# Altium PCB 22270A_BoiteBruitage_LDD.PcbDoc
Units mm, origin at the board's own origin, x right, y up, seen from the top; angles counter-clockwise.
Board outline 130.66 x 56.64 mm, 2 copper layers (Top Layer, Bottom Layer), stack 1.586 mm thick; 94 components, 74 nets, 299 pads, 35 vias.
Unrouted connection lines stored in the file: 47.
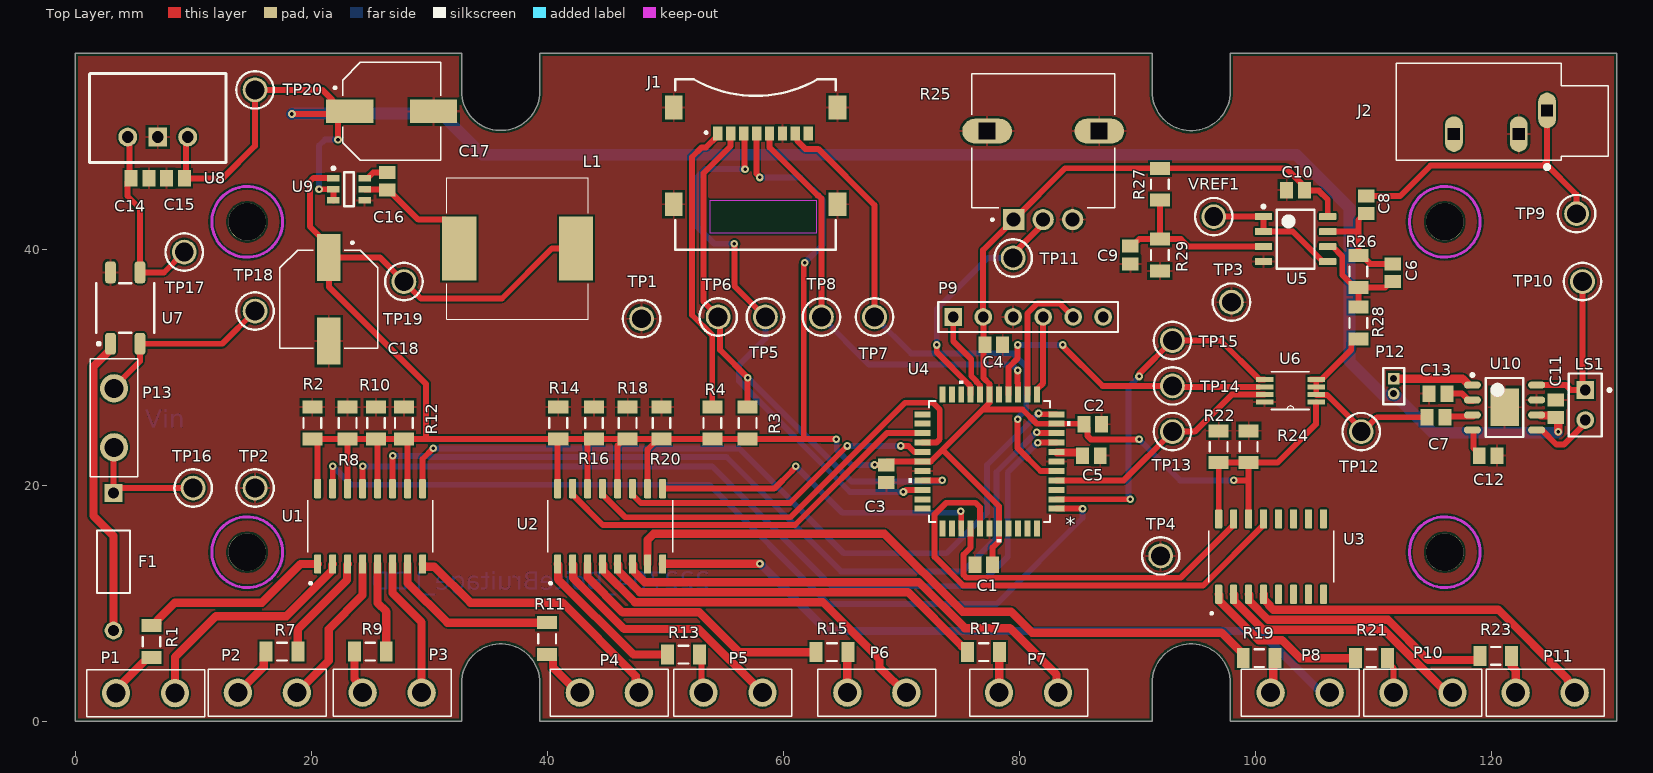
[diagram p0: Top Layer view]
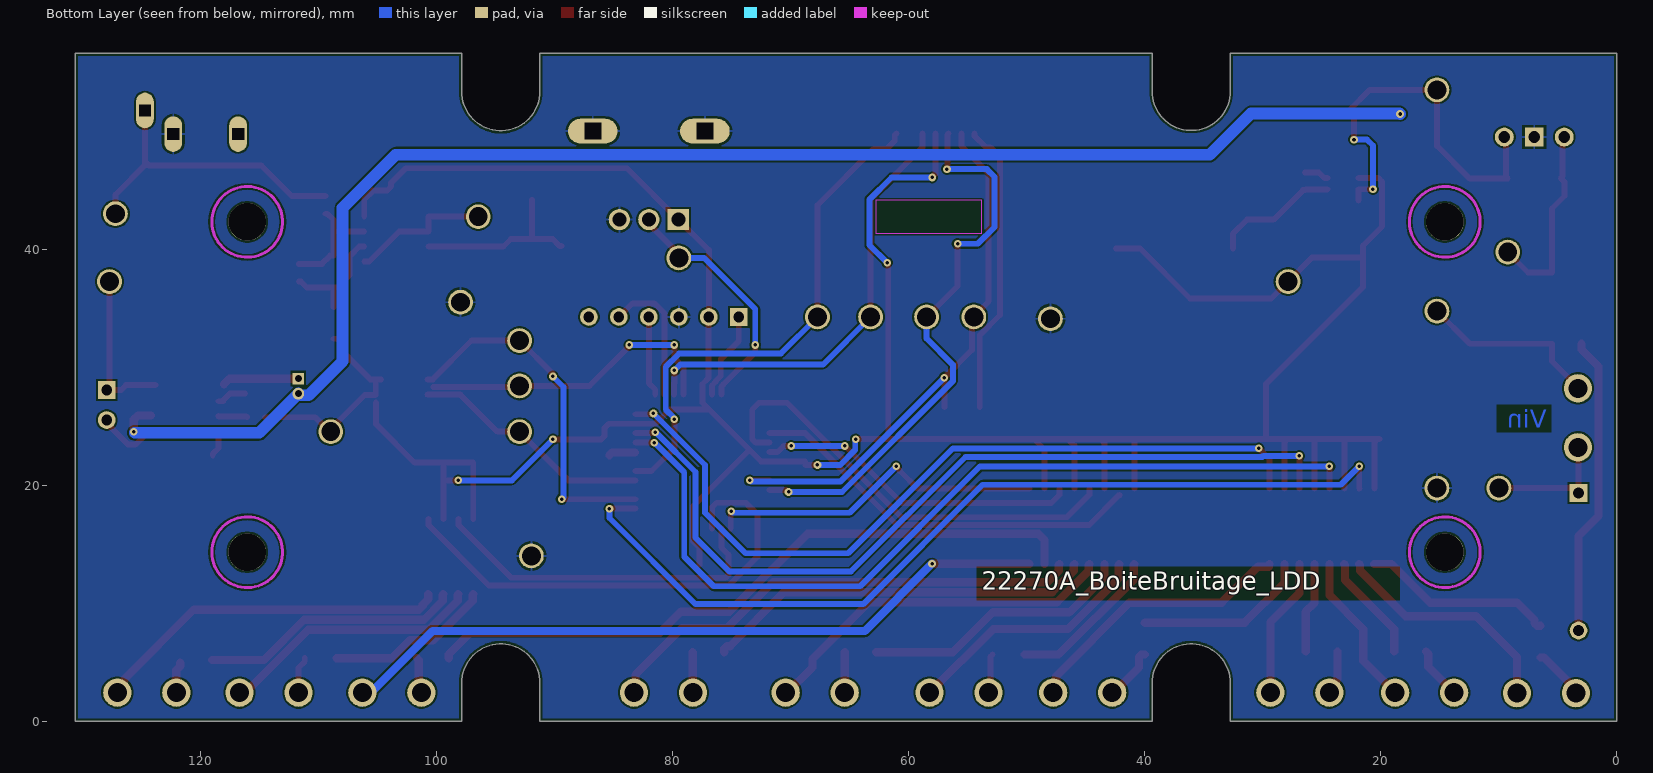
[diagram p1: Bottom Layer view, seen from below]

## Layer stack, top to bottom
Top Solder: solder mask 0.0102, Solder Resist, Dk 3.5
Top Layer: signal copper 0.018
Dielectric1: core 1.55, FR-4, Dk 4.8
Bottom Layer: signal copper 0.018
Bottom Solder: solder mask 0.0102, Solder Resist, Dk 3.5

## Board outline
32.76,0 32.76,3.235 cw(c36.075,3.235) 39.39,3.235 39.39,0 91.27,0 91.27,3.235 cw(c94.585,3.235) 97.9,3.235 97.9,0 97.905,-0.025 130.665,-0.025 130.665,56.585 97.905,56.585 97.905,53.35 cw(c94.59,53.35) 91.275,53.35 91.275,56.585 91.27,56.61 39.39,56.61 39.39,53.375 cw(c36.075,53.375) 32.76,53.375 32.76,56.61 0,56.61 0,0

## Design rules (kind name [scope] priority, off if disabled: settings)
BoardOutlineClearance [All] p1: gap=0.25 ignorepadtopadclearanceinfootprint=FALSE except(0: Arc-SplitContinuation Track-SplitContinuation SMDPad-SplitContinuation THPad-SplitContinuation Via-SplitContinuation Fill-SplitContinuation Poly-SplitContinuation Region-SplitContinuation Text-SplitContinuation)
Clearance Clearance-xPP-xTP-xTT [All] p1: gap=0.151 ignorepadtopadclearanceinfootprint=FALSE
ComponentClearance [All] p1: gap=0.25 collisioncheckmode=3 verticalgap=0.25 showdistances=FALSE
DiffPairsRouting [All] p1: maxlimit=0.25 minlimit=0.25 mostfreqgap=0.25 toplayer_minwidth=0.381 toplayer_maxwidth=0.381 toplayer_prefwidth=0.381 bottomlayer_minwidth=0.381 bottomlayer_maxwidth=0.381 bottomlayer_prefwidth=0.381 maxuncoupledlength=12.5
Height [All] p1: minheight=0 maxheight=30 prefheight=12.5
HoleSize HoleSize-PTH [All] p1: absolutevalues=TRUE maxlimit=10 minlimit=0.25 maxpercent=80.000 minpercent=20.000
HoleToHoleClearance [All] p1: gap=0.35 allowstackedmicrovias=FALSE
MinimumAnnularRing "Minimum IAR  >0.45mm" [((ObjectKind = 'Pad') OR (ObjectKind = 'Via')) And (Layer = 'MultiLayer') And (HoleDiameter > AsMM(0.45))] p1: minimumring=0.175 // minimum inner annular ring for pads > 0.45mm finished hole size
MinimumAnnularRing "Minimum IAR <=0.45mm" [((ObjectKind = 'Pad') OR (ObjectKind = 'Via')) And (Layer = 'MultiLayer') And (HoleDiameter <= AsMM(0.45))] p2: minimumring=0.175 // minimum inner annular ring for pads <= 0.45mm finished hole size
MinimumSolderMaskSliver [All] p1: minsoldermaskwidth=0.08
PasteMaskExpansion [All] p1: expansion=-0.025
PlaneClearance PlaneClearance-IPI [All] p1: clearance=0.25
PlaneConnect [All] p1: planeconnectstyle=Relief reliefexpansion=0.175 reliefentries=4 reliefconductorwidth=0.2 reliefairgap=0.2
PolygonConnect PolygonConnect-xTW [All] p1: connectstyle=Relief reliefconductorwidth=0.2 reliefentries=4 polygonreliefangle="90 Angle" airgapwidth=0.2
RoutingCorners [All] p1: cornerstyle=45-Degree minsetback=2.5 maxsetback=2.5
RoutingVias RoutingViasES [All] p1: holewidth=0.3 width=0.65 viastyle="Through Hole" minholewidth=0.25 minwidth=0.61 maxholewidth=0.45 maxwidth=0.8 // finishet hole size <= 0.45mm
SilkToSilkClearance [All] p1: silktosilkclearance=0.2
SilkToSolderMaskClearance SilkscreenOverComponentPads [IsPad] p1: minsilkscreentomaskgap=0.2 clearancetoexposedcopper=TRUE
SolderMaskExpansion [All] p1: expansion=0 istentingtop=FALSE
UnRoutedNet [All] p1: checkbadconnections=TRUE
Width Width-xTW [All] p1: maxlimit=1.5 minlimit=0.15 preferedwidth=0.2
17 further rules are at their usual default settings.

## Classes and differential pairs
component class Schéma_Global: C1 C2 C3 C4 C5 C6 C7 C8 C9 C10 C11 C12 C13 J2 LS1 P1 P2 P3 P4 P5 P6 P7 P8 P9 P10 P11 P12 R1 R2 R3 R4 R7 R8 R9 R10 R11 R12 R13 R14 R15 R16 R17 R18 R19 R20 R21 R22 R23 R24 R25 R26 R27 R28 R29 TP1 TP2 TP3 TP4 TP5 TP6 TP7 TP8 TP9 TP10 TP11 TP12 TP13 TP14 TP15 U1 U2 U3 U4 U5 U6 U10 VREF1
component class Alimentations: C14 C15 C16 C17 C18 F1 L1 P13 TP16 TP17 TP18 TP19 TP20 U7 U8 U9

## Components (designator, comment, footprint, x,y, rotation, side; value= is the part's Value field where it differs from the comment)
C1 "Cap" C0805 77,13.25 r180 top value=100nF
C2 "Cap" C0805 86.233,25.153 r0 top value=100nF
C3 "Cap" C0805 68.75,20.955 r270 top value=100nF
C4 "Cap" C0805 77.863,31.877 r0 top value=100nF
C5 "Cap" C0805 86.13,22.5 r180 top value=100nF
C6 "Cap" C0805 111.684,38 r270 top value=470pF
C7 "Cap" C0805 115.33,25.75 r180 top value=0,47uF
C8 "Cap" C0805 109.434,43.75 r270 top value=1uF
C9 "Cap" C0805 89.434,39.5 r90 top value=330nF
C10 "Cap" C0805 103.434,45 r0 top value=100nF
C11 "Cap" C0805 125.497,26.476 r90 top value=10uF
C12 "Cap" C0805 119.75,22.5 r180 top value=0,47uF
C13 "Cap" C0805 115.5,27.75 r0 top value=0,47uF
C14 "Cap" C0805 5.5,46 r180 top value=10uF
C15 "Cap" C0805 8.5,46 r0 top value=22uF
C16 "Cap" C0805 26.435,45.75 r270 top value=100nF
C17 "Cap Pol1" CAP_EEEFK1E331GP 26.83,51.67 r0 top value=22uF
C18 "Cap Pol1" CAP_EEEFK1E331GP 21.5,35.75 r270 top value=22uF
F1 "500 mA" PIN-W2/E2.8 3.25,13.5 r270 top
J1 "GMC020080HR" GCT_MEM2067-02-180-00-A_REVB 57.675,47.175 r180 top
J2 "SJ1-3533NG" CUI_SJ1-3533NG 124.75,51.75 r180 top
L1 "4,7 uH" CDRH125101MC 37.5,40.05 r90 top
LS1 "Speaker" PIN2 127.987,28.054 r270 top
P1 "691312510002" 691312710002 5.969,2.365 r180 top
P2 "691312510002" 691312710002 16.296,2.413 r180 top
P3 "691312510002" 691312710002 26.865,2.413 r180 top
P4 "691312510002" 691312710002 45.275,2.413 r180 top
P5 "691312510002" 691312710002 55.753,2.413 r180 top
P6 "691312510002" 691312710002 67.945,2.413 r180 top
P7 "691312510002" 691312710002 80.8,2.413 r180 top
P8 "691312510002" 691312710002 103.819,2.413 r180 top
P9 "76384-406LF" HDR1X6 74.42,34.25 r0 top
P10 "691312510002" 691312710002 114.231,2.413 r180 top
P11 "691312510002" 691312710002 124.587,2.413 r180 top
P12 "691312510002" MHDR1X2 111.75,29.02 r270 top
P13 "691312510002" 691312710002 3.3,25.7 r270 top
R1 "Res2" C1206 6.477,6.731 r90 top value=200
R2 "Res2" C1206 20.103,25.254 r90 top value=10K
R3 "Res2" C1206 57,25.254 r270 top value=10K
R4 "Res2" C1206 54,25.254 r270 top value=10K
R7 "Res2" C1206 17.526,5.889 r0 top value=200
R8 "Res2" C1206 23.095,25.25 r90 top value=10K
R9 "Res2" C1206 25.019,5.889 r0 top value=200
R10 "Res2" C1206 25.5,25.254 r90 top value=10K
R11 "Res2" C1206 40.005,6.985 r90 top value=200
R12 "Res2" C1206 27.865,25.254 r90 top value=10K
R13 "Res2" C1206 51.562,5.635 r180 top value=200
R14 "Res2" C1206 40.945,25.254 r90 top value=10K
R15 "Res2" C1206 64.135,5.842 r180 top value=200
R16 "Res2" C1206 43.98,25.254 r90 top value=10K
R17 "Res2" C1206 77,5.842 r180 top value=200
R18 "Res2" C1206 46.83,25.25 r90 top value=10K
R19 "Res2" C1206 100.35,5.334 r180 top value=200
R20 "Res2" C1206 49.695,25.254 r90 top value=10K
R21 "Res2" C1206 109.855,5.334 r180 top value=200
R22 "Res2" C1206 96.92,23.25 r90 top value=10K
R23 "Res2" C1206 120.4,5.525 r180 top value=200
R24 "Res2" C1206 99.46,23.25 r90 top value=10K
R25 "P0915N-FC15BR100K" TRIM_P0915N-FC15BR100K 82.04,50 r0 top
R26 "Res2" C1206 108.752,38.1 r90 top value=33K
R27 "Res2" C1206 91.934,45.5 r90 top value=120K
R28 "Res2" C1206 108.752,33.75 r90 top value=120K
R29 "Res2" C1206 91.934,39.5 r90 top value=120K
TP1 "5011" KSTN-5011_V 48.006,34.099 r0 top
TP2 "5011" KSTN-5011_V 15.25,19.75 r0 top
TP3 "5011" KSTN-5011_V 98,35.5 r0 top
TP4 "5011" KSTN-5011_V 92,14 r0 top
TP5 "5012" KSTN-5012_V 58.5,34.25 r0 top
TP6 "5012" KSTN-5012_V 54.5,34.25 r0 top
TP7 "5012" KSTN-5012_V 67.75,34.25 r180 top
TP8 "5012" KSTN-5012_V 63.25,34.25 r0 top
TP9 "5012" KSTN-5012_V 127.25,43 r0 top
TP10 "5012" KSTN-5012_V 127.75,37.25 r0 top
TP11 "5012" KSTN-5012_V 79.5,39.25 r0 top
TP12 "5012" KSTN-5012_V 109,24.527 r0 top
TP13 "5012" KSTN-5012_V 93,24.527 r0 top
TP14 "5012" KSTN-5012_V 93,28.407 r0 top
TP15 "5012" KSTN-5012_V 93,32.25 r0 top
TP16 "5010" KSTN-5010_V 10,19.75 r0 top
TP17 "5010" KSTN-5010_V 9.25,39.75 r0 top
TP18 "5011" KSTN-5011_V 15.25,34.75 r0 top
TP19 "5010" KSTN-5010_V 27.865,37.25 r0 top
TP20 "5010" KSTN-5010_V 15.25,53.5 r0 top
U1 "IS2805-4" Opto_SOIC 25,16.5 r90 top
U2 "IS2805-4" Opto_SOIC 45.339,16.5 r90 top
U3 "IS2805-4" Opto_SOIC 101.365,13.945 r90 top
U4 "PIC32MX230F256D-I/PT" TQFP44_PT_MCH 77.5,22 r180 top
U5 "LM6132BIM" D0008A_N 103.434,40.85 r0 top
U6 "AD5620CRMZ-1" SOP65P490X110-8N 103,28 r180 top
U7 "CBRHDSH1-40L" CBRHDSH1-40L 4.25,35 r90 top
U8 "173950536" 173950536 7,49.5 r0 top
U9 "AP63203WU" AP63203WU 23.215,45.075 r0 top
U10 "BD78310EFJ-ME2" AOP_HASOP-J8 121.143,26.575 r0 top
VREF1 "5014" KSTN-5014_V 96.5,42.75 r90 top

## Footprints (in the part's own frame and the unit in brackets; to place one, negate y for a bottom-side part, rotate by r counter-clockwise, add the part's x,y. Pads: shape width x height; smd on the part's side, far side on the other; paste and mask are expansions set on the pad)
173950536 [mm]
  round 1.6 hole 1: 1(-2.54,0) 3(2.54,0)
  rect 1.6x1.6 hole 1: 2(0,0)
  silkscreen extent -5.8,-2.15 5.8,5.4
691312710002 [mm]
  round 2.4 hole 1.6: 1(-2.5,0) 2(2.5,0)
  silkscreen extent -5,-2 5,2, body extent -5.1,-1.68 4.9,10.32, height 8.75
AOP_HASOP-J8 [mm] "TSOP, 8-Leads, Body 4,90x3,90mm, Pitch 1,27mm, IPC Medium Density"
  oval 1.45x0.6 smd: 1(-2.725,1.905) 2(-2.725,0.635) 3(-2.725,-0.635) 4(-2.725,-1.905) 5(2.725,-1.905) 6(2.725,-0.635) 7(2.725,0.635) 8(2.725,1.905)
  rect 2.4x3.2 smd: 9(0.007,0.025)
  silkscreen extent -2.85,-2.5 1.6,2.88, body extent -2,-2.5 2,2.5, height 1
AP63203WU [mm] "SOT23, 6-Leads, Body 2,85x2,80mm, Pitch 0,95mm, IPC Medium Density"
  rect 1.05x0.55 smd: 1(-1.325,0.95) 2(-1.325,0) 3(-1.325,-0.95) 4(1.325,-0.95) 5(1.325,0) 6(1.325,0.95)
  silkscreen extent -1.45,-1.45 0.4,1.9, body extent -0.8,-1.45 0.8,1.45, height 1
C0805 [mm] "Chip Capacitor, Body 2.0x1.3mm, IPC High Density"
  rect 1.1x1.4 smd: 1(-0.75,0) 2(0.75,0)
  body extent -1.1,-0.72 1.1,0.72, height 1.4
C1206 [mm] "Chip Capacitor, Body 3.2x1.6mm, IPC High Density"
  rect 1.1x1.7 smd: 1(-1.35,0) 2(1.35,0)
  silkscreen extent -0.4,-0.75 0.4,0.75, body extent -1.7,-0.9 1.7,0.9, height 1.3
CAP_EEEFK1E331GP [mm]
  rect 4x2 smd: 1(-3.55,0) 2(3.55,0)
  silkscreen extent -4.9,-4.15 4.15,4.15, body extent -4.85,-4.15 4.85,4.15, height 10.2
CBRHDSH1-40L [mm] "SOT143, 4-Leads, Body 4,70x7,00mm, Pitch 2,50mm, IPC Medium Density"
  rrect50% 1.85x0.9 smd: 1(-3.025,1.25) 2(-3.025,-1.25) 3(3.025,-1.25) 4(3.025,1.25)
  silkscreen extent -3.15,-2.45 2.1,2.45, body extent -2.1,-2.45 2.1,2.45, height 2.5
CDRH125101MC [mm]
  rect 5.4x2.9 smd: 1(0,4.95) 2(0,-4.95)
  silkscreen extent -6,-6 6,6
CUI_SJ1-3533NG [mm]
  oval 1.508x3.016 hole 1 square: 1(0,0) 2(2.4,2) 3(7.9,2)
  silkscreen extent -5.2,-4 12.8,4.97
D0008A_N [mm] "SOIC, 8-Leads, Body 5x4mm, Pitch 1.27mm, IPC Medium Density"
  rrect17% 1.45x0.6 smd: 1(-2.725,1.905) 2(-2.725,0.635) 3(-2.725,-0.635) 4(-2.725,-1.905) 5(2.725,-1.905) 6(2.725,-0.635) 7(2.725,0.635) 8(2.725,1.905)
  silkscreen extent -2.85,-2.5 1.6,2.88, body extent -3,-2.45 3,2.45, height 1.63
GCT_MEM2067-02-180-00-A_REVB [mm]
  rect 0.8x1.2 smd: 1(3.225,-2.625) 2(2.125,-2.625) 3(1.025,-2.625) 4(-0.075,-2.625) 5(-1.175,-2.625) 6(-2.275,-2.625) 7(-3.375,-2.625) 8(-4.475,-2.625)
  rect 1.5x2 smd: 9(-6.945,-4.825) 10(-6.945,3.375) 11(6.945,3.375) 12(6.945,-4.825)
  Keep-Out Layer region: 3.85,3.028 -5.155,3.028 -5.155,5.825 3.85,5.825
  silkscreen extent -6.8,-7.22 6.8,7.22
HDR1X6 [mm] "Connector; Header; 6 Position"
  rect 1.5x1.5 hole 0.9: 1(0,0)
  round 1.5 hole 0.9: 2(2.54,0) 3(5.08,0) 4(7.62,0) 5(10.16,0) 6(12.7,0)
  silkscreen extent -1.27,-1.27 13.97,1.27
KSTN-5010_V [mm] "Test Point, Dia 3.17mm"
  round 2.1 hole 1.6: 1(0,0)
  silkscreen extent -1.59,-1.58 1.59,1.58, body extent -1.59,-1.59 1.59,1.59, height 8.13
KSTN-5011_V [mm] "Test Point, Dia 3.17mm"
  round 2.1 hole 1.6: 1(0,0)
  silkscreen extent -1.59,-1.58 1.59,1.58, body extent -1.59,-1.59 1.59,1.59, height 8.13
KSTN-5012_V [mm] "Test Point, Dia 3.17mm"
  round 2.1 hole 1.6: 1(0,0)
  silkscreen extent -1.59,-1.58 1.59,1.58, body extent -1.59,-1.59 1.59,1.59, height 8.13
KSTN-5014_V [mm] "Test Point, Dia 3.17mm"
  round 2.1 hole 1.6: 1(0,0)
  silkscreen extent -1.58,-1.59 1.58,1.59, body extent -1.59,-1.59 1.59,1.59, height 8.13
MHDR1X2 [mm] "Connector; Header; 2 Position"
  rect 1x1 hole 0.6: 1(0,0)
  round 1 hole 0.6: 2(1.27,0)
  silkscreen extent -0.9,-0.9 2.17,0.9
Opto_SOIC [mm]
  rrect25% 1.62x0.6 smd: 1(-3.195,4.445) 2(-3.195,3.175) 3(-3.195,1.905) 4(-3.195,0.635) 5(-3.195,-0.635) 6(-3.195,-1.905) 7(-3.195,-3.175) 8(-3.195,-4.445) 9(3.195,-4.445) 10(3.195,-3.175) 11(3.195,-1.905) 12(3.195,-0.635) 13(3.195,0.635) 14(3.195,1.905) 15(3.195,3.175) 16(3.195,4.445)
  silkscreen extent -4.91,-5.3 2.2,5.3
PIN2 [mm] "Photosensitive Diode; 2 Leads"
  rect 1.5x1.5 hole 0.9: 1(0,0)
  round 1.5 hole 0.9: 2(2.54,0)
  silkscreen extent -1.4,-1.4 3.94,2.18
PIN-W2/E2.8 [mm] "Thru-Hole; 2 Leads"
  rect 1.5x1.5 hole 0.9: 1(-5.825,0)
  round 1.5 hole 0.9: 2(5.825,0)
  silkscreen extent -2.65,-1.4 2.65,1.4
SOP65P490X110-8N [mil]
  rect 59x17 smd: 1(-86,38) 2(-86,13) 3(-86,-13) 4(-86,-38) 5(86,-38) 6(86,-13) 7(86,13) 8(86,38)
  silkscreen extent -63,-63 63,63, body extent -96,-59 96,59, height 43
TQFP44_PT_MCH [mil]
  rect 53x20 smd paste+0 mask+0: 1(-223.5,157.48) 2(-223.5,125.98) 3(-223.5,94.49) 4(-223.5,62.99) 5(-223.5,31.5) 6(-223.5,0) 7(-223.5,-31.5) 8(-223.5,-62.99) 9(-223.5,-94.49) 10(-223.5,-125.98) 11(-223.5,-157.48) 23(223.5,-157.48) 24(223.5,-125.98) 25(223.5,-94.49) 26(223.5,-62.99) 27(223.5,-31.5) 28(223.5,0) 29(223.5,31.5) 30(223.5,62.99) 31(223.5,94.49) 32(223.5,125.98) 33(223.5,157.48)
  rect 20x53 smd paste+0 mask+0: 12(-157.48,-223.5) 13(-125.98,-223.5) 14(-94.49,-223.5) 15(-62.99,-223.5) 16(-31.5,-223.5) 17(0,-223.5) 18(31.5,-223.5) 19(62.99,-223.5) 20(94.49,-223.5) 21(125.98,-223.5) 22(157.48,-223.5) 34(157.48,223.5) 35(125.98,223.5) 36(94.49,223.5) 37(62.99,223.5) 38(31.5,223.5) 39(0,223.5) 40(-31.5,223.5) 41(-62.99,223.5) 42(-94.49,223.5) 43(-125.98,223.5) 44(-157.48,223.5)
  silkscreen extent -270,-270 270,270, body extent -236,-236 236,236, height 47
TRIM_P0915N-FC15BR100K [mm]
  rect 1.8x1.8 / inner round 1.8 / far side rect 1.8x1.8 hole 1.2: 1(-2.5,-7.5)
  round 1.8 hole 1.2: 2(0,-7.5) 3(2.5,-7.5)
  oval 4.2x2.1 hole 1.4 square: S1(-4.75,0) S2(4.75,0)
  silkscreen extent -6.05,-7.6 6.05,4.85, body extent -6.05,-6.25 6.05,6.25, height 26

## Part data
C1 C2 C3 C4 C5 C6 C7 C8 C9 C10 C11 C12 C13 C14 C15 C16: "Capacitor", LatestRevisionDate=17-Jul-2002, LatestRevisionNote="Re-released for DXP Platform.", PackageDescription="Radial Cap, Thru-Hole; 2 Leads; 0.3 in Pin Spacing", PackageReference=RAD-0.3, Published=8-Jun-2000, Publisher="Altium Limited"
C17 C18: "Polarized Capacitor (Radial)", LatestRevisionDate=17-Jul-2002, LatestRevisionNote="Re-released for DXP Platform.", PackageDescription="Polarized Capacitor (Radial); 2 Leads", PackageReference=RB7.6-15, Published=8-Jun-2000, Publisher="Altium Limited"
F1: library part "Fuse 1", "Fuse", LatestRevisionDate=17-Jul-2002, LatestRevisionNote="Re-released for DXP Platform.", PackageDescription="Thru-Hole; 2 Leads", PackageReference=PIN-W2/E2.8, Published=8-Jun-2000, Publisher="Altium Limited"
J1: "2 In 1 Connector Sd+mmc", Package=None, Availability="In Stock", Check_prices=https://www.snapeda.com/parts/GMC020080HR/Amphenol+Commercial+Products/view-part/?ref=eda, MF="Amphenol ICC (Commercial Products)", MP=GMC020080HR, Price=None, Purchase-URL=https://pricing.snapeda.com/search/part/GMC020080HR/?ref=eda, SnapEDA_Link=https://www.snapeda.com/parts/GMC020080HR/Amphenol+Commercial+Products/view-part/?ref=snap
J2: "3.5 mm Right-Angle Stereo Jack, 3 Pin PCB Mount, Isolated Ground", Package=None, Availability=Unavailable, MF="{'manufacturer': u'CUI'}", MP=SJ1-3533NG, Price=None
L1: library part CDRH125NP-220MC, "Fixed Inductors 22uH 2.80A 0.028ohms", Manufacturer_Name=Sumida, Datasheet Link=http://products.sumida.com/products/pdf/CDRH125,CDRH125LD.pdf, Geometry.Height=6mm, Manufacturer_Part_Number=CDRH125NP-220MC
LS1: "Loudspeaker", LatestRevisionDate=17-Jul-2002, LatestRevisionNote="Re-released for DXP Platform.", PackageReference=PIN2, Published=24-Mar-1999, Publisher="Altium Limited"
P1 P2 P3 P4 P5 P6 P7 P8 P10 P11 P12 P13: library part MHDR1X2, "Header, 2-Pin", LatestRevisionDate=17-Jul-2002, LatestRevisionNote="Re-released for DXP Platform.", Publisher="Altium Limited"
P9: library part "Header 6", "Header, 6-Pin", LatestRevisionDate=17-Jul-2002, LatestRevisionNote="Re-released for DXP Platform.", Publisher="Altium Limited"
R1 R2 R3 R4 R7 R8 R9 R10 R11 R12 R13 R14 R15 R16 R17 R18 R19 R20 R21 R22 R23 R24 R26 R27 R28 R29: "Resistor", LatestRevisionDate=17-Jul-2002, LatestRevisionNote="Re-released for DXP Platform.", PackageDescription="Axial Device, Thru-Hole; 2 Leads; 0.4 in Pin Spacing", PackageReference=AXIAL-0.4, Published=8-Jun-2000, Publisher="Altium Limited"
R25: "Res Conductive Plastic POT 100K Ohm 20% 0.05W(1/20W) 1(Elec)/1(Mech)Turns 6mm (12.1 X 14.85 X 28.5mm) Pin Panel Mount/Through Hole Box/Tray", Package=None, Availability="In Stock", Check_prices=https://www.snapeda.com/parts/P0915N-FC15BR100K/BI+Technologies/view-part/?ref=eda, MF="BI Technologies (TT electronics)", MP=P0915N-FC15BR100K, Price=None, Purchase-URL=https://pricing.snapeda.com/search/part/P0915N-FC15BR100K/?ref=eda, SnapEDA_Link=https://www.snapeda.com/parts/P0915N-FC15BR100K/BI+Technologies/view-part/?ref=snap
TP1 TP2 TP3 TP4 TP18: library part CMP-1672-00003-4, "Test Point, Black, Through Hole, RoHS, Bulk", Colour=Black, Manufacturer=Keystone, Package Quantity=100, ComponentLink1Description="Manufacturer URL", ComponentLink1URL=http://www.keyelco.com/, ComponentLink2Description=Datasheet, ComponentLink2URL=http://www.keyelco.com/product-pdf.cfm?p=1320, Contact Material=Bronze, Contact Plating=Silver, DatasheetVersion="Rev. F, 12/2013", Height="8.12 mm", Mount="Through Hole", Mounting Technology="Through Hole", PackageDescription="1-Pin Through Hole Device, Dia 3.17 mm", PackageReference=5011, Packaging=Bulk, Pins=1, REACH SVHC="No SVHC", RoHSCompliant=true
TP5 TP6 TP7 TP8 TP9 TP10 TP11 TP12 TP13 TP14 TP15: library part CMP-1672-00004-4, "Test Point, White, Through Hole, RoHS, Bulk", Colour=White, Manufacturer=Keystone, Package Quantity=100, ComponentLink1Description="Manufacturer URL", ComponentLink1URL=http://www.keyelco.com/, ComponentLink2Description=Datasheet, ComponentLink2URL=http://www.keyelco.com/product-pdf.cfm?p=1321, Contact Material=Bronze, Contact Plating=Silver, DatasheetVersion="Rev. F, 12/2013", Height="8.12 mm", Length="11.3 mm", Mount="Through Hole", Mounting Technology="Through Hole", PackageDescription="1-Pin Through Hole Device, Dia 3.17 mm", PackageReference=5012, Packaging=Bulk, Pins=1, REACH SVHC="No SVHC", RoHSCompliant=true
TP16 TP17 TP19 TP20: library part CMP-1672-00002-4, "Test Point, Red, Through Hole, RoHS, Bulk", Colour=Red, Manufacturer=Keystone, Package Quantity=100, ComponentLink1Description="Manufacturer URL", ComponentLink1URL=http://www.keyelco.com/, ComponentLink2Description=Datasheet, ComponentLink2URL=http://www.keyelco.com/product-pdf.cfm?p=1319, Contact Material=Bronze, Contact Plating=Silver, DatasheetVersion="Rev. F, 12/2013", Height="8.12 mm", Mount="Through Hole", Mounting Technology="Through Hole", PackageDescription="1-Pin Through Hole Device, Dia 3.17 mm", PackageReference=5010, Packaging=Bulk, Pins=1, REACH SVHC="No SVHC", RoHSCompliant=true
U1 U2 U3: Package=None, Availability=Unavailable, MP=VOS615A-1X001T, Price=None
U4: "No Description Available", Mfr_Name=Microchip, Copyright="Copyright (C) 2023 Ultra Librarian. All rights reserved.", Manufacturer_Part_Number=PIC32MX230F256D-I/PT, RefDes=RefDes, Type=DEV
U5: library part CMP-0055-00790-3, "Dual Low Power 10 MHz Rail-to-Rail I/O Operational Amplifier, 8-pin Narrow SOIC", Manufacturer="Texas Instruments", Package Reference=D0008A, PackageTopMarking=NSZXTT*LM61*32BIM, PowerWise=N, Code_IPC=SOIC127P600-8, Code_JEDEC=MS-012-AA, ComponentLink1Description="Datasheet URL", ComponentLink1URL=http://www.ti.com/general/docs/lit/getliterature.tsp?genericPartNumber=LM6132&fileType=pdf, CompType=Amplifiers, PackageDescription="SOIC Narrow, 4.9 x 3.9 x 1.45mm, 8 Lead, 1.27mm Pitch", PinCount=8, RoHS=N
U6: "Single, 12-Bit nanoDACÂ® with 5 ppm/Â°C On-Chip Reference in SOT-23", Package="MSOP-8 Analog Devices", Availability="In Stock", Check_prices=https://www.snapeda.com/parts/AD5620CRMZ-1/Analog+Devices/view-part/?ref=eda, MF="Analog Devices", MP=AD5620CRMZ-1, Price=None, Purchase-URL=https://pricing.snapeda.com/search/part/AD5620CRMZ-1/?ref=eda, SnapEDA_Link=https://www.snapeda.com/parts/AD5620CRMZ-1/Analog+Devices/view-part/?ref=snap
U10: "1.2W MONAURAL SPEAKER AMPLIFIER", Manufacturer_Name="ROHM Semiconductor", Mouser Part Number=755-BD78310EFJ-ME2, Datasheet Link=http://www.farnell.com/datasheets/2976892.pdf, Geometry.Height=1mm, Manufacturer_Part_Number=BD78310EFJ-ME2, Mouser Price/Stock=https://www.mouser.co.uk/ProductDetail/ROHM-Semiconductor/BD78310EFJ-ME2?qs=BJlw7L4Cy78WwGkJ9o75rg%3D%3D
VREF1: library part CMP-1672-00006-4, "Test Point, Yellow, Through Hole, RoHS, Bulk", Colour=Yellow, Manufacturer=Keystone, Package Quantity=100, ComponentLink1Description="Manufacturer URL", ComponentLink1URL=http://www.keyelco.com/, ComponentLink2Description=Datasheet, ComponentLink2URL=http://www.keyelco.com/product-pdf.cfm?p=1323, Contact Material=Bronze, Contact Plating=Silver, DatasheetVersion="Rev. F, 12/2013", Height="8.12 mm", Mount="Through Hole", Mounting Technology="Through Hole", PackageDescription="1-Pin Through Hole Device, Dia 3.17 mm", PackageReference=5014, Packaging=Bulk, REACH SVHC="No SVHC", RoHSCompliant=true

## Free pads (board coordinates)
  round 3.2 hole 3.2: ""(14.58,14.31) ""(14.58,42.31) ""(116.08,14.31) ""(116.08,42.31)

## Via types
v1: diameter 0.65, hole 0.3, Top Layer to Bottom Layer, 35 vias

## Nets (pads, with @x,y where several pads share a name; then routed paths per layer and width w, separated by ;. In a path a pad name is that pad's centre, name@x,y a point inside that pad or via, vN(x,y) a via of type N, cw(c..) or ccw(c..) an arc to the next point about the centre after c; other vN are vias at no path point)
+3,3V: C1.1 C2.1 C3.1 C4.1 C10.2 C18.1 J1.4 L1.2 P9.2 R2.1 R3.2 R4.2 R8.1 R10.1 R12.1 R14.1 R16.1 R18.1 R20.1 R22.1 R24.1 R25.1 R27.2 TP19.1 U1.10 U1.12 U1.14 U1.16 U2.10 U2.12 U2.14 U2.16 U3.14 U3.16 U4.10 U4.17 U4.28 U4.40 U5.8 U6.1 U9.1 | length 285.3
  Top Layer w0.2: R2.1@20.008,23.809 R2.1
  Top Layer w0.5: R2.1 R2.1@20.255,23.904 ; U1.16 20.555,23.604 R2.1@20.255,23.904 ; U9.1 20.193,46.025 19.9,45.732 19.9,41.9 21.5,40.3 C18.1 ; U1.14 R8.1 ; U1.12 25.635,23.769 R10.1 ; U1.10 28.175,23.604 R12.1@27.875,23.904 ; U2.16 40.894,23.853 R14.1 ; L1.2 40.408,40.05 36.172,35.814 29.301,35.814 TP19.1 25.815,39.3 C18.1 ; U2.14 43.434,23.604 R16.1@43.734,23.904 ; U2.12 45.974,23.344 46.53,23.9 R18.1 ; U2.10 48.514,23.023 R20.1@49.395,23.904 ; J1.4 57.75,46.391 58.025,46.116 v1(58.025,46.075) ; v1(61.85,38.85) 61.85,38.809 61.75,38.709 61.75,23.904 ; v1(64.516,23.876) 64.502,23.89 63.264,23.89 63.25,23.904 61.75,23.904 ; v1(67.75,21.705) C3.1 ; C3.1@68.795,22.004 71.819,22.004 U4.28 71.827,22.004 72.521,22.004 73.513,22.995 ; P9.2 76.98,34.23 76.98,31.877 76.98,30.533 77,30.513 77,29.063 77.496,28.567 U4.17@77.496,27.673 ; P9.2@76.96,34.253 76.96,39.92 R25.1 83.89,46.85 R27.2 102.652,46.85 103.884,45.617 103.884,45.3 C10.2 104.226,44.958 105.41,44.958 106.159,44.209 U5.8 ; 77.496,26.979 76.94,26.423 ; U4.17 77.504,27.673 77.504,26.979 ; C1.1 77.75,14.7 78.296,15.246 78.296,16.319 U4.40 78.3,18.208 73.513,22.995 ; v1(90.17,23.876) 86.076,23.876 85.783,24.169 85.783,24.853 85.437,25.2 U4.10 81.5,25.2 80.296,26.404 76.959,26.404 76.94,26.423 ; U3.16 R22.1 R24.1 ; v1(98.19,20.4) 99.46,20.4 ; U3.14 99.46,20.4 ; U6.1@105.184,27.001 105.156,26.972 105.156,25.153 101.903,21.9 R24.1 ; R2.1@20.255,23.904 R10.1 ; C18.1 21.5,36.8 29.75,28.55 29.75,23.904 ; R10.1 R12.1 R12.1@27.875,23.904 ; R12.1@27.875,23.904 29.75,23.904 ; 29.75,23.904 R14.1 ; R14.1 R16.1@43.734,23.904 ; R16.1@43.734,23.904 R16.1 R20.1@49.395,23.904 ; R20.1@49.395,23.904 R20.1 R4.2 R3.2 61.75,23.904 ; 73.513,22.995 76.94,26.423 ; 99.46,20.4 R24.1
  Bottom Layer w0.5: v1(58.025,46.075) 61.469,46.075 63.35,44.194 63.35,40.35 v1(61.85,38.85) ; v1(64.516,23.876) 64.545,23.847 64.545,22.988 65.827,21.705 v1(67.75,21.705) ; v1(90.17,23.876) 93.646,20.4 v1(98.19,20.4)
+5V: C11.1 C15.2 C17.1 P12.2 TP20.1 U8.3 U9.2 U9.3 U10.6 | length 167.5
  Top Layer w0.5: U8.3 9.395,49.355 9.395,46.145 C15.2 12.5,46 15.25,48.75 TP20.1 20.95,53.5 22.7,51.75 C17.1@22.7,51.5 ; v1(18.375,51.45) 22.25,51.45 C17.1@22.28,51.42 ; v1(20.675,45.075) U9.2 U9.3 ; v1(22.28,49.275) C17.1@22.28,51.42 ; C17.1 23.03,51.42 22.6,51.42 C17.1@22.28,51.42
  Top Layer w0.7: U10.6@124.243,25.89 125.333,25.89 C11.1 ; C11.1@125.531,25.726 125.7,25.557 v1(125.7,24.525)
  Bottom Layer w0.5: v1(20.675,45.075) 20.675,48.775 21.175,49.275 v1(22.28,49.275)
  Bottom Layer w1: v1(18.375,51.45) 18.425,51.5 31,51.5 34.5,48 103.5,48 108,43.5 108,30.496 110.877,27.619 P12.2@111.75,27.619 ; P12.2 115.068,24.432 v1@125.607,24.432
GND: C1.2 C2.2 C3.2 C4.2 C5.1 C9.1 C10.1 C11.2 C12.1 C13.1 C14.1 C15.1 C17.2 C18.2 J1.6 J1.9 J1.10 J1.11 J1.12 J2.2 P9.3 R2.2 R8.2 R10.2 R12.2 R14.2 R16.2 R18.2 R20.2 R22.2 R24.2 R25.3 R25.S1 R25.S2 R29.1 TP1.1 TP2.1 TP3.1 TP4.1 U4.6 U4.16 U4.29 U4.39 U5.4 U6.8 U7.4 U8.2 U9.4 U10.7 U10.9
"Input 1": U3.13 U4.38 | length 41.3
  Top Layer w0.5: U4.38 76.696,16.327 76.696,18.122 76.312,18.506 73.823,18.506 72.845,17.528 72.845,13.917 75.264,11.498 95.598,11.498 100.73,16.63 U3.13
"Input 2": U3.15 U4.37 | length 29.5
  Top Layer w0.5: U4.37 75.9,14.717 75.299,14.116 75.299,12.384 75.534,12.149 93.709,12.149 98.19,16.63 U3.15
"Input 3": U2.9 U4.36 | length 29.2
  Top Layer w0.5: U2.9 59.245,19.695 60.75,21.2 60.75,21.212 61.087,21.549 v1(61.087,21.59) ; v1(75.057,17.78) 75.057,17.739 75.096,17.7 75.096,16.327 U4.36
  Bottom Layer w0.5: v1(61.087,21.59) 65.024,17.653 74.93,17.653 v1(75.057,17.78)
"Input 4": U2.11 U4.27 | length 27.6
  Top Layer w0.5: U2.11 47.244,19.185 47.945,18.484 60.585,18.484 65.416,23.315 v1(65.445,23.315) ; v1(69.977,23.315) 70.614,23.315 71.125,22.804 71.819,22.804 U4.27
  Bottom Layer w0.5: v1(65.445,23.315) v1(69.977,23.315)
"Input 5": U2.13 U4.26 | length 38.2
  Top Layer w0.5: U2.13 44.704,19.185 46.617,17.272 60.63,17.272 70.336,26.979 72.704,26.979 73.279,26.404 73.279,23.893 72.986,23.6 U4.26
"Input 6": U2.15 U4.25 | length 34
  Top Layer w0.5: U2.15@42.164,19.125 42.164,19.185 44.728,16.621 61.012,16.621 68.791,24.4 U4.25
"Input 7": U1.9 U4.11 | length 67.6
  Top Layer w0.5: U1.9 29.445,22.206 v1(30.353,23.114) ; v1(81.654,26.073) 81.695,26.073 81.767,26 U4.11
  Bottom Layer w0.5: v1(30.353,23.114) 56.261,23.114 65.151,14.224 73.857,14.224 77.286,17.653 77.286,21.704 v1(81.654,26.073)
"Input 8": U1.11 U4.9 | length 71.3
  Top Layer w0.5: U1.11 26.915,19.704 26.915,22.47 v1(26.924,22.479) ; v1(81.5,24.474) 81.541,24.474 81.615,24.4 U4.9
  Bottom Layer w0.5: v1(26.924,22.479) 29.961,22.479 30.052,22.388 55.209,22.388 64.922,12.675 75.217,12.675 78.086,15.544 78.086,21.113 81.281,24.308 81.293,24.308 81.459,24.474 v1(81.5,24.474)
"Input 9": U1.13 U4.8 | length 74.1
  Top Layer w0.5: U1.13 v1(24.365,21.59) ; v1(81.582,23.582) 81.596,23.596 83.173,23.596 U4.8
  Bottom Layer w0.5: v1(24.365,21.59) 53.975,21.59 64.135,11.43 76.542,11.43 79.038,13.926 79.038,21.075 81.545,23.582 v1(81.582,23.582)
"Input 10": U1.15 U4.1 | length 76.3
  Top Layer w0.5: U1.15 21.835,19.704 21.835,21.581 v1(21.844,21.59) ; U4.1 v1(85.38,18)
  Bottom Layer w0.5: v1(21.844,21.59) 23.409,20.025 53.762,20.025 63.881,9.906 78.082,9.906 85.38,17.204 v1(85.38,18)
MCLR: P9.1 U4.18 | length 7.5
  Top Layer w0.5: P9.1 74.42,32.19 75.946,30.664 75.946,29.246 76.406,28.786 76.406,28.736 76.696,28.446 76.696,27.681 U4.18
NetC5_2: C5.2 U4.7 | length 2.3
  Top Layer w0.7: U4.7@83.222,22.755 85.18,22.755 85.38,22.555 C5.2
NetC6_1: C6.1 C8.2 R26.2 U5.7 | length 9.7
  Top Layer w0.5: U5.7 108.752,41.485 ; C8.2 109.284,43 108.752,42.468 108.752,41.485 ; C6.1 109.752,38.75 109.052,39.45 R26.2 108.752,41.485
NetC6_2: C6.2 R26.1 R28.2 U5.6 | length 9.8
  Top Layer w0.5: U5.6 106.584,40.215 107.393,39.406 107.393,37.809 108.452,36.75 R26.1 ; R28.2 R26.1 ; C6.2 111.534,37.25 111.034,36.75 R26.1
NetC7_1: C7.1 U10.3 | length 2.5
  Top Layer w0.5: C7.1 116.15,25.82 118.499,25.82 U10.3@118.518,25.84
NetC7_2: C7.2 R28.1 TP12.1 U6.2 U6.3 U6.4 | length 18.5
  Top Layer w0.5: U6.4@104.719,28.965 U6.4 ; R28.1 108.452,32.4 108.152,32.1 108.152,31.468 105.65,28.965 U6.4 ; C7.2 110.322,25.75 109.099,24.527 TP12.1 109,24.751 106.1,27.652 105.202,27.652 U6.2 U6.3 U6.4
NetC8_1: C8.1 J2.1 TP9.1 | length 26.3
  Top Layer w0.5: C8.1 112.3,44.5 114.875,47.075 124.415,47.075 124.604,47.263 127.25,44.617 TP9.1 ; 124.75,47.117 J2.1
NetC9_2: C9.2 R27.1 R29.2 U5.3 | length 15.1
  Top Layer w0.5: C9.2 89.584,40.25 90.184,40.85 R29.2 ; R27.1 R29.2 ; U5.3 94.361,40.215 93.726,40.85 R29.2
NetC12_2: C12.2 U10.4 | length 2.3
  Top Layer w0.5: U10.4@118.518,24.623 118.518,23.132 119,22.65 C12.2
NetC13_2: C13.2 U10.2 | length 2.6
  Top Layer w0.5: C13.2 117.55,27.75 118.074,27.226 118.074,27.156 118.12,27.11 U10.2@118.518,27.11
NetC14_2: C14.2 TP17.1 U7.3 U8.1 | length 16.6
  Top Layer w0.5: U8.1 4.605,49.355 4.605,46.145 C14.2 4.45,45.7 4.45,45.01 4.44,45 4.44,44.5 5.5,43.44 U7.3 7.525,38.025 TP17.1
NetC16_1: C16.1 U9.6 | length 2.1
  Top Layer w0.5: U9.6 24.79,46.025 25.265,46.5 C16.1
NetC16_2: C16.2 L1.1 U9.5 | length 10.8
  Top Layer w0.5: U9.5 24.565,45.05 26.385,45.05 C16.2 26.585,45 29.085,42.5 31.35,42.5 32.55,41.3 L1.1
NetF1_1: F1.1 P13.2 TP16.1 | length 10.7
  Top Layer w0.5: F1.1 F1.1@3.25,19.75 ; P13.2@3.25,23.25 F1.1@3.25,19.75 ; TP16.1@9.892,20.142 9.5,19.75 F1.1@3.25,19.75
NetF1_2: F1.2 U7.1 | length 25.6
  Top Layer w0.7: U7.1 3,31.5 1.549,30.049 1.549,17.401 3.25,15.7 F1.2
NetJ1_1: J1.1 R4.1 | length 25
  Top Layer w0.5: R4.1 54,32.698 52.275,34.423 52.275,47.8 53.1,48.625 53.475,48.625 54.45,49.6 J1.1
NetLS1_1: LS1.1 TP10.1 U10.8 | length 13.9
  Top Layer w0.5: U10.8 126.338,28.48 126.763,28.054 128.236,28.054 127.75,28.54 TP10.1
NetLS1_2: LS1.2 U10.5 | length 5.6
  Top Layer w0.5: U10.5@123.976,24.631 123.988,24.643 124.332,24.643 125.55,23.425 126.175,23.425 LS1.2@128.25,25.5
NetP1_1: P1.1 U1.2 | length 20
  Top Layer w0.7: P1.1 8.469,5.421 11.938,8.89 17.915,8.89 21.775,12.75 21.775,13.255 U1.2
NetP1_2: P1.2 R1.1 | length 4.4
  Top Layer w0.7: P1.2 3.469,2.673 6.177,5.381 R1.1
NetP2_1: P2.1 U1.4 | length 13.2
  Top Layer w0.7: P2.1 21.5,5.117 21.5,7.804 24.365,10.669 U1.4
NetP2_2: P2.2 R7.1 | length 4.5
  Top Layer w0.7: P2.2 15.976,4.593 15.976,5.689 R7.1
NetP3_1: P3.1 U1.6 | length 11.9
  Top Layer w0.7: U1.6 26.905,10.845 29.365,8.385 P3.1
NetP3_2: P3.2 R9.1 | length 3.8
  Top Layer w0.7: R9.1 23.669,3.569 24.365,2.873 P3.2
NetP4_1: P4.1 U1.8 | length 23.7
  Top Layer w0.7: U1.8 29.495,13.255 29.495,13.09 30.435,13.09 33.492,10.033 41.305,10.033 47.511,3.827 47.511,2.527 P4.1@47.752,2.286
NetP4_2: P4.2 R11.1 | length 4.7
  Top Layer w0.7: R11.1 40.305,5.635 40.505,5.435 40.505,4.533 P4.2@42.752,2.286
NetP5_1: P5.1 U2.2 | length 21.4
  Top Layer w0.7: U2.2 42.214,13.255 42.214,12.12 46.53,7.804 52.852,7.804 58.253,2.403 P5.1@58.253,2.286
NetP5_2: P5.2 R13.1 | length 3.5
  Top Layer w0.5: R13.1 53.082,5.465 53.082,2.457 P5.2@53.253,2.286
NetP6_1: P6.1 U2.4 | length 31
  Top Layer w0.7: U2.4 44.754,13.255 44.754,12.75 47.433,10.071 63.365,10.071 68.181,5.254 68.181,4.55 P6.1@70.445,2.286
NetP6_2: P6.2 R15.1 | length 3.6
  Top Layer w0.7: P6.2@65.445,2.286 R15.1@65.445,5.842
NetP7_1: P7.1 U2.6 | length 41.8
  Top Layer w0.7: U2.6 47.294,13.255 47.294,12.75 48.271,11.773 71.499,11.773 75.398,7.874 79.219,7.874 83.162,3.93 83.162,2.424 P7.1@83.3,2.286
NetP7_2: P7.2 R17.1 | length 3.6
  Top Layer w0.7: P7.2@78.3,2.286 78.325,2.311 78.325,5.817 R17.1
NetP8_1: P8.1 U2.8 | length 61.5
  Top Layer w0.7: U2.8 49.814,13.335 v1(58.039,13.335)
  Bottom Layer w0.7: v1(58.039,13.335) 63.742,7.632 100.357,7.632 P8.1@106.386,1.603
NetP8_2: P8.2 R19.1 | length 3.9
  Top Layer w0.7: P8.2@101.386,1.603 101.543,1.76 101.543,5.177 R19.1
NetP10_1: P10.1 U3.2 | length 22.8
  Top Layer w0.7: U3.2 98.24,10.7 98.24,10.195 100.698,7.737 110.911,7.737 116.731,1.917 P10.1@116.731,1.603
NetP10_2: P10.2 R21.1 | length 3.9
  Top Layer w0.5: R21.1 111.205,5.034 111.731,4.508 P10.2@111.731,1.603
NetP11_1: P11.1 U3.4 | length 30.4
  Top Layer w0.7: U3.4 100.73,10.34 101.199,9.871 101.199,9.776 101.536,9.439 120.611,9.439 126.471,3.579 126.471,3.489 127.087,2.873 P11.1
NetP11_2: P11.2 R23.1 | length 3.4
  Top Layer w0.7: R23.1@121.746,4.953 121.746,4.653 122.087,4.312 P11.2@122.087,1.651
NetP12_1: P12.1 U10.1 | length 6.5
  Top Layer w0.7: P12.1 117.583,29.02 118.043,28.56 U10.1@118.043,28.53
NetP13_1: P13.1 TP18.1 U7.2 | length 15.6
  Top Layer w0.5: P13.1@3.25,28.25 5.5,30.5 U7.2 12.475,31.975 TP18.1
NetR1_2: R1.2 U1.1 | length 16.4
  Top Layer w0.7: R1.2 6.777,8.081 6.977,8.281 6.977,8.562 8.448,10.033 15.828,10.033 19.1,13.305 U1.1
NetR7_2: R7.2 U1.3 | length 9.2
  Top Layer w0.7: R7.2 18.876,7.789 23.045,11.958 23.045,13.255 U1.3
NetR9_2: R9.2 U1.5 | length 7.7
  Top Layer w0.7: U1.5 25.635,10.009 26.369,9.275 R9.2
NetR11_2: R11.2 U1.7 | length 14.8
  Top Layer w0.7: U1.7 28.175,11.703 31.543,8.335 R11.2
NetR13_2: R13.2 U2.1 | length 13.2
  Top Layer w0.7: U2.1 40.944,13.255 40.944,12.015 47.324,5.635 R13.2
NetR15_2: R15.2 U2.3 | length 23.1
  Top Layer w0.7: U2.3 43.434,12.192 46.406,9.22 52.896,9.22 56.274,5.842 R15.2
NetR17_2: R17.2 U2.5 | length 33.2
  Top Layer w0.7: U2.5 46.024,13.255 46.024,12.75 47.852,10.922 70.57,10.922 75.15,6.342 75.45,6.342 75.65,6.142 R17.2
NetR19_2: R19.2 U2.7 | length 57.3
  Top Layer w0.7: U2.7 48.514,15.367 49.017,15.87 68.605,15.87 75.204,9.271 79.316,9.271 81.094,7.493 97.141,7.493 99,5.634 R19.2
NetR21_2: R21.2 U3.1 | length 14.1
  Top Layer w0.7: U3.1 96.97,10.7 96.97,10.195 100.307,6.858 102.285,6.858 103.809,5.334 R21.2
NetR23_2: R23.2 U3.3 | length 22.2
  Top Layer w0.7: U3.3 99.51,10.7 99.51,10.195 101.117,8.588 111.263,8.588 114.674,5.177 R23.2@119.046,5.177
NetU5_1: U5.1 U5.2 U5.5 VREF1.1 | length 12
  Top Layer w0.5: VREF1.1 96.502,42.753 100.707,42.753 U5.1 U5.2 103.194,41.485 105.734,38.945 U5.5
PGEC: P9.5 U4.13 | length 11.6
  Top Layer w0.5: U4.13 80.7,34.538 81.563,35.401 83.429,35.401 P9.5
PGED: P9.4 U4.12 | length 6.8
  Top Layer w0.5: U4.12 81.5,28.096 82.04,28.636 P9.4
Pot: R25.2 TP11.1 U4.19 | length 21
  Top Layer w0.5: v1(73.025,31.877) 73.025,31.246 75.755,28.516 75.755,28.467 75.896,28.326 75.896,27.681 U4.19 ; TP11.1 79.5,39.608 82.04,42.148 R25.2
  Bottom Layer w0.5: v1(73.025,31.877) 73.025,34.922 77.353,39.25 TP11.1
"SPI1 CLK": J1.5 TP8.1 U4.14 | length 38
  Top Layer w0.5: J1.5 58.85,48.625 62.927,44.548 62.996,44.548 63.25,44.294 TP8.1 ; v1(79.883,29.718) 79.883,28.643 79.896,28.63 79.896,27.681 U4.14
  Bottom Layer w0.5: TP8.1 67.274,30.226 79.375,30.226 v1(79.883,29.718)
"SPI1 CS": J1.2 R3.1 TP6.1 U4.30 | length 47.6
  Top Layer w0.5: J1.2 55.55,48.725 53.25,46.425 53.25,35.546 54.5,34.296 TP6.1 54.651,34.099 54.651,31.46 v1(57,29.111) R3.1 ; U4.30 v1(73.5,20.4)
  Bottom Layer w0.5: v1(57,29.111) 65.791,20.32 73.42,20.32 v1(73.5,20.4)
"SPI1 MISO": J1.7 TP7.1 U4.5 | length 44.8
  Top Layer w0.5: J1.7 61.2,49.65 61.2,49.183 61.883,48.5 62.975,48.5 67.75,43.725 TP7.1@67.75,34.5 ; TP7.1 TP7.1@68,34.5 ; v1(79.883,25.59) 79.883,23.13 81.813,21.2 U4.5
  Bottom Layer w0.5: TP7.1 70.849,31.151 79.477,31.151 80.609,30.019 80.609,26.396 v1@79.938,25.725
"SPI1 MOSI": J1.3 TP5.1 U4.31 | length 48.5
  Top Layer w0.5: v1(55.875,40.45) 55.875,36.875 TP5.1 ; J1.3 56.746,49.704 56.746,46.803 v1(56.775,46.774) ; v1(70.2,19.417) 70.241,19.417 70.423,19.6 U4.31
  Bottom Layer w0.5: v1(55.875,40.45) 54.158,40.45 52.75,41.858 52.75,46.125 53.399,46.774 v1(56.775,46.774) ; TP5.1 58.5,32.426 56.274,30.2 56.274,28.81 65.667,19.417 v1(70.2,19.417)
"SPI2 CLK": TP14.1 U4.15 U6.6 | length 26.5
  Top Layer w0.5: U4.15 79.1,29.962 79.883,30.745 v1(79.883,31.877) ; v1(83.693,31.877) 83.693,31.78 87.066,28.407 TP14.1 93.086,28.321 100.074,28.321 100.081,28.314 U6.6@100.316,28.314
  Bottom Layer w0.5: v1(79.883,31.877) v1(83.693,31.877)
"SPI2 CS": TP15.1 U4.2 U6.5 | length 30.5
  Top Layer w0.5: U4.2 v1(89.434,18.8) ; v1(90.17,29.21) 90.199,29.239 90.199,29.449 TP15.1 97.066,32.25 100.35,28.965 U6.5
  Bottom Layer w0.5: v1(89.434,18.8) 89.281,18.953 89.281,28.321 v1(90.17,29.21)
"SPI2 MOSI": TP13.1 U4.4 U6.7 | length 20.6
  Top Layer w0.5: U4.4 88.873,20.4 TP13.1 94.88,24.527 98.016,27.663 100.809,27.663 U6.7
pads on no net: J1.8 J2.3 P9.6 U3.5 U3.6 U3.7 U3.8 U3.9 U3.10 U3.11 U3.12 U4.3 U4.20 U4.21 U4.22 U4.23 U4.24 U4.32 U4.33 U4.34 U4.35 U4.41 U4.42 U4.43 U4.44

## Polygon pours and split planes (outlines as drawn)
GND on Bottom Layer "GND_L02_P007" (solid, pour order 7): 0,56.642 0,0 130.683,0 130.683,56.515 0.127,56.515
GND on Top Layer "GND_L01_P006" (solid, pour order 6): 0,0 0,56.642 130.683,56.642 130.683,0

## Keep-outs
Keep-Out Layer:
  circle w0.254: c116.08,14.31 r3
  circle w0.254: c116.08,42.31 r3
  circle w0.254: c14.58,42.31 r3
  circle w0.254: c14.58,14.31 r3

## Other copper
Bottom Layer:
  text "Vin" at 5.954,24.879 h1.52
  text "22270A_BoiteBruitage_LDD" at 53.829,11.137 h1.52

## Silkscreen, mask and mechanical layers (free items; w line width, h text height)
Bottom Overlay:
  text "22270A_BoiteBruitage_LDD" at 53.829,11.137 h1.52
Board Outline (ES):
  lines w0.254: 39.39,3.235 ccw(c36.075,3.235) 32.76,3.235 32.76,0 0,0 0,56.61 32.76,56.61 32.76,53.375 ccw(c36.075,53.375) 39.39,53.375 39.39,56.61 91.27,56.61 ; 39.39,3.25 39.39,0 52.36,0 78.3,0 91.27,0 91.27,3.25 ; 91.27,3.235 cw(c94.585,3.235) 97.9,3.235 97.9,0 ; 91.275,56.585 91.275,53.35 ccw(c94.59,53.35) 97.905,53.35 97.905,56.585 130.665,56.585 130.665,-0.025 ; 97.905,0 130.665,0

## Dimensions
0,0 to 0,56.61 on Top Dims
0,0 to 130.675,-0.025 on Top Dims

## Text inside footprints (layer, text, board x,y; h text height)
U4: Top Overlay "*" at 84.802,17.854 h1.27 r180; Components Bodies "*" at 82.44,18.235 h1.27 r180